# Altium PCB TFT.PcbDoc
Units mil, origin at the board's own origin, x right, y up, seen from the top; angles counter-clockwise.
Board outline 1574.8 x 1574.8 mil, 2 copper layers (Top Layer, Bottom Layer), stack 50.044 mil thick; 7 components, 10 nets, 38 pads, 0 vias.
Unrouted connection lines stored in the file: 8.
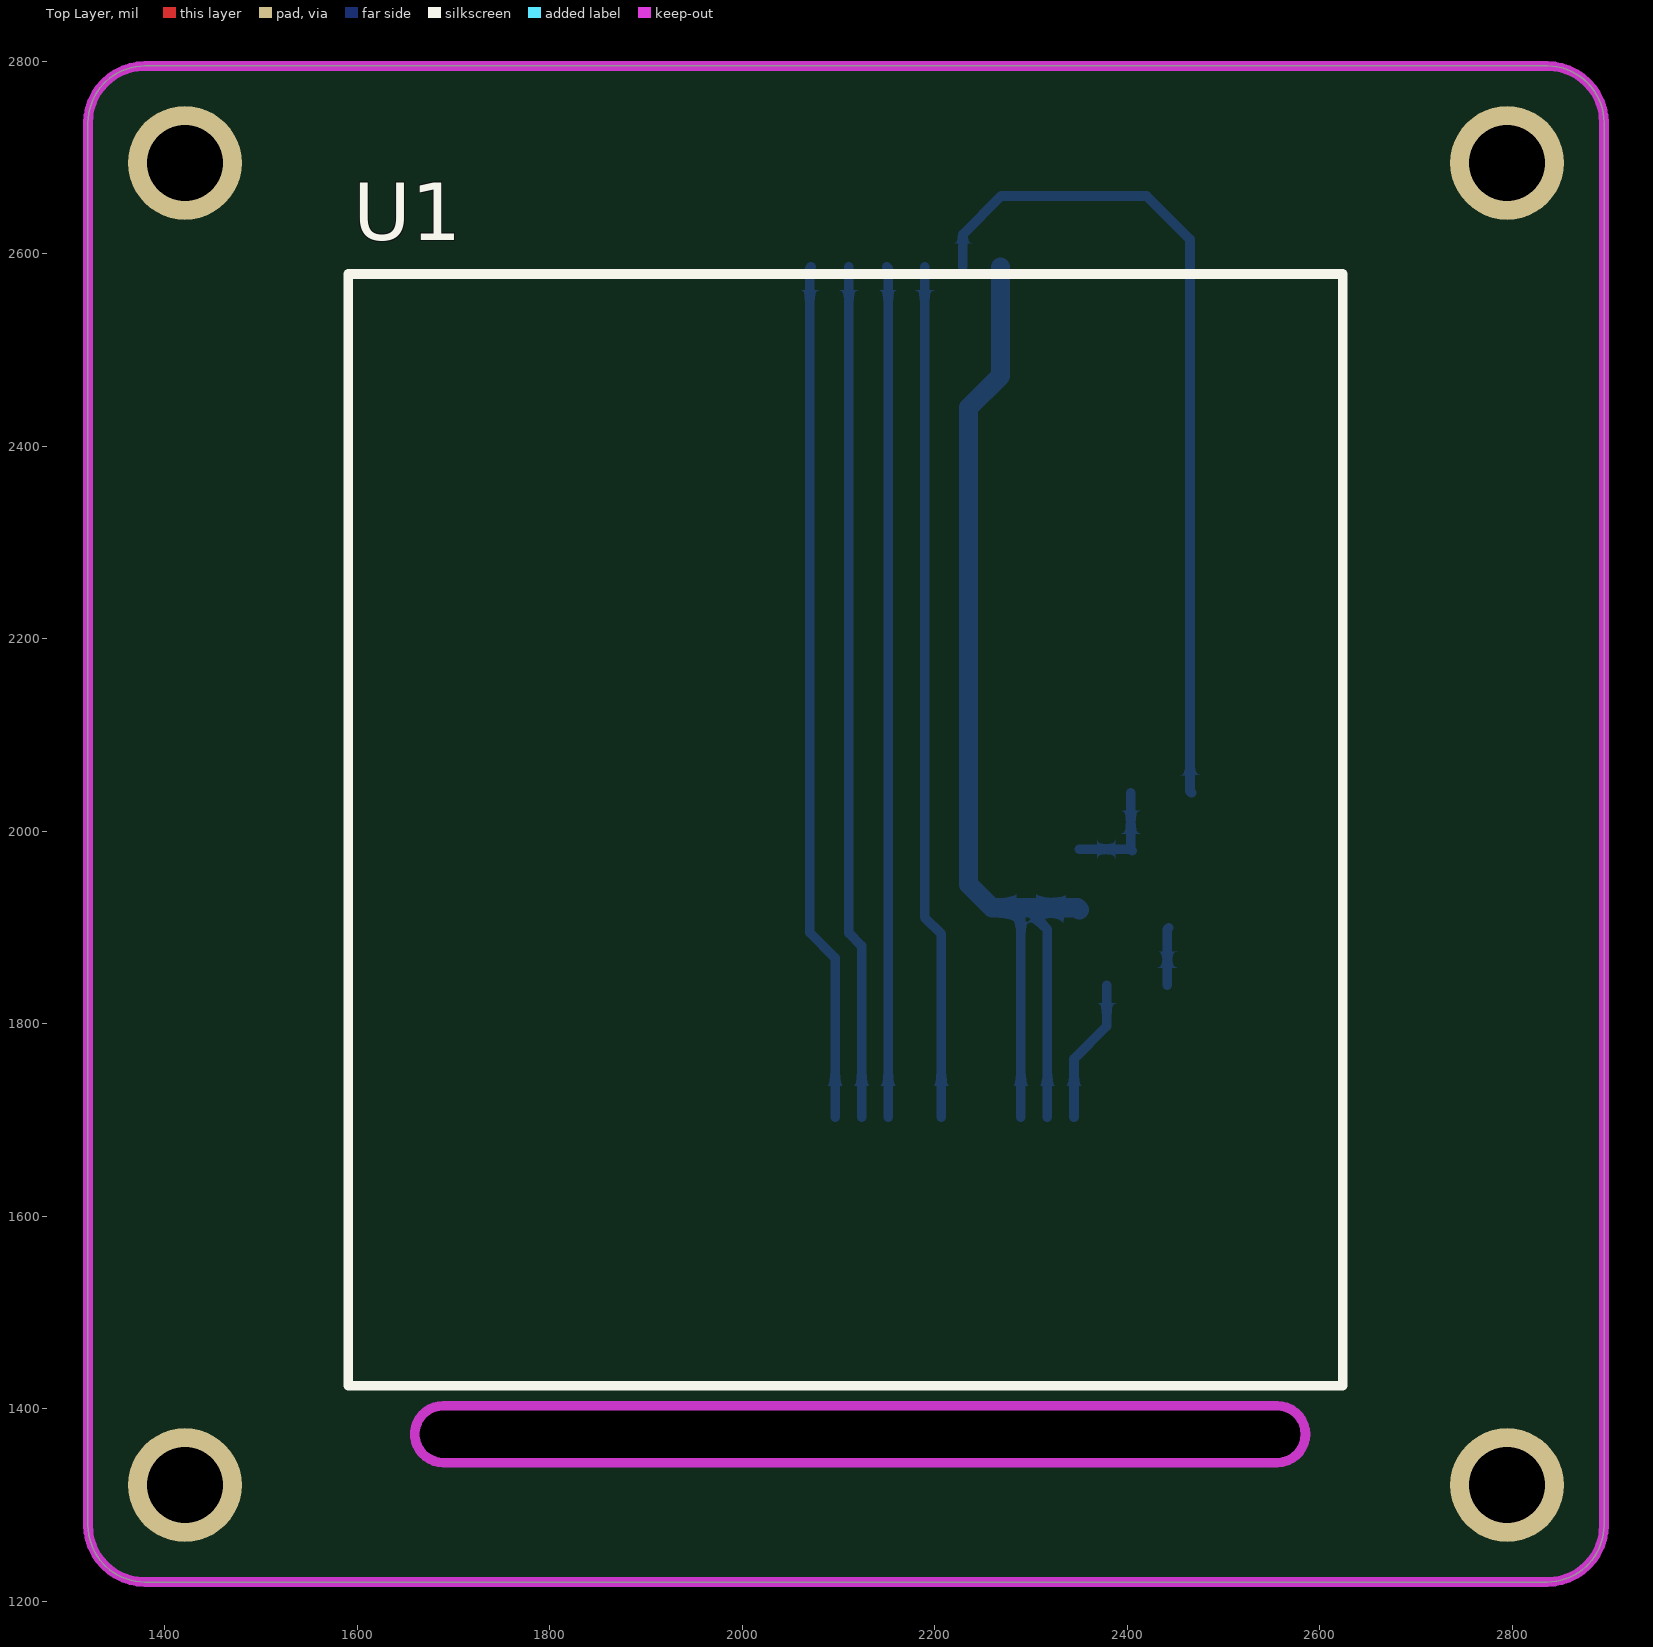
[diagram p0: Top Layer view]
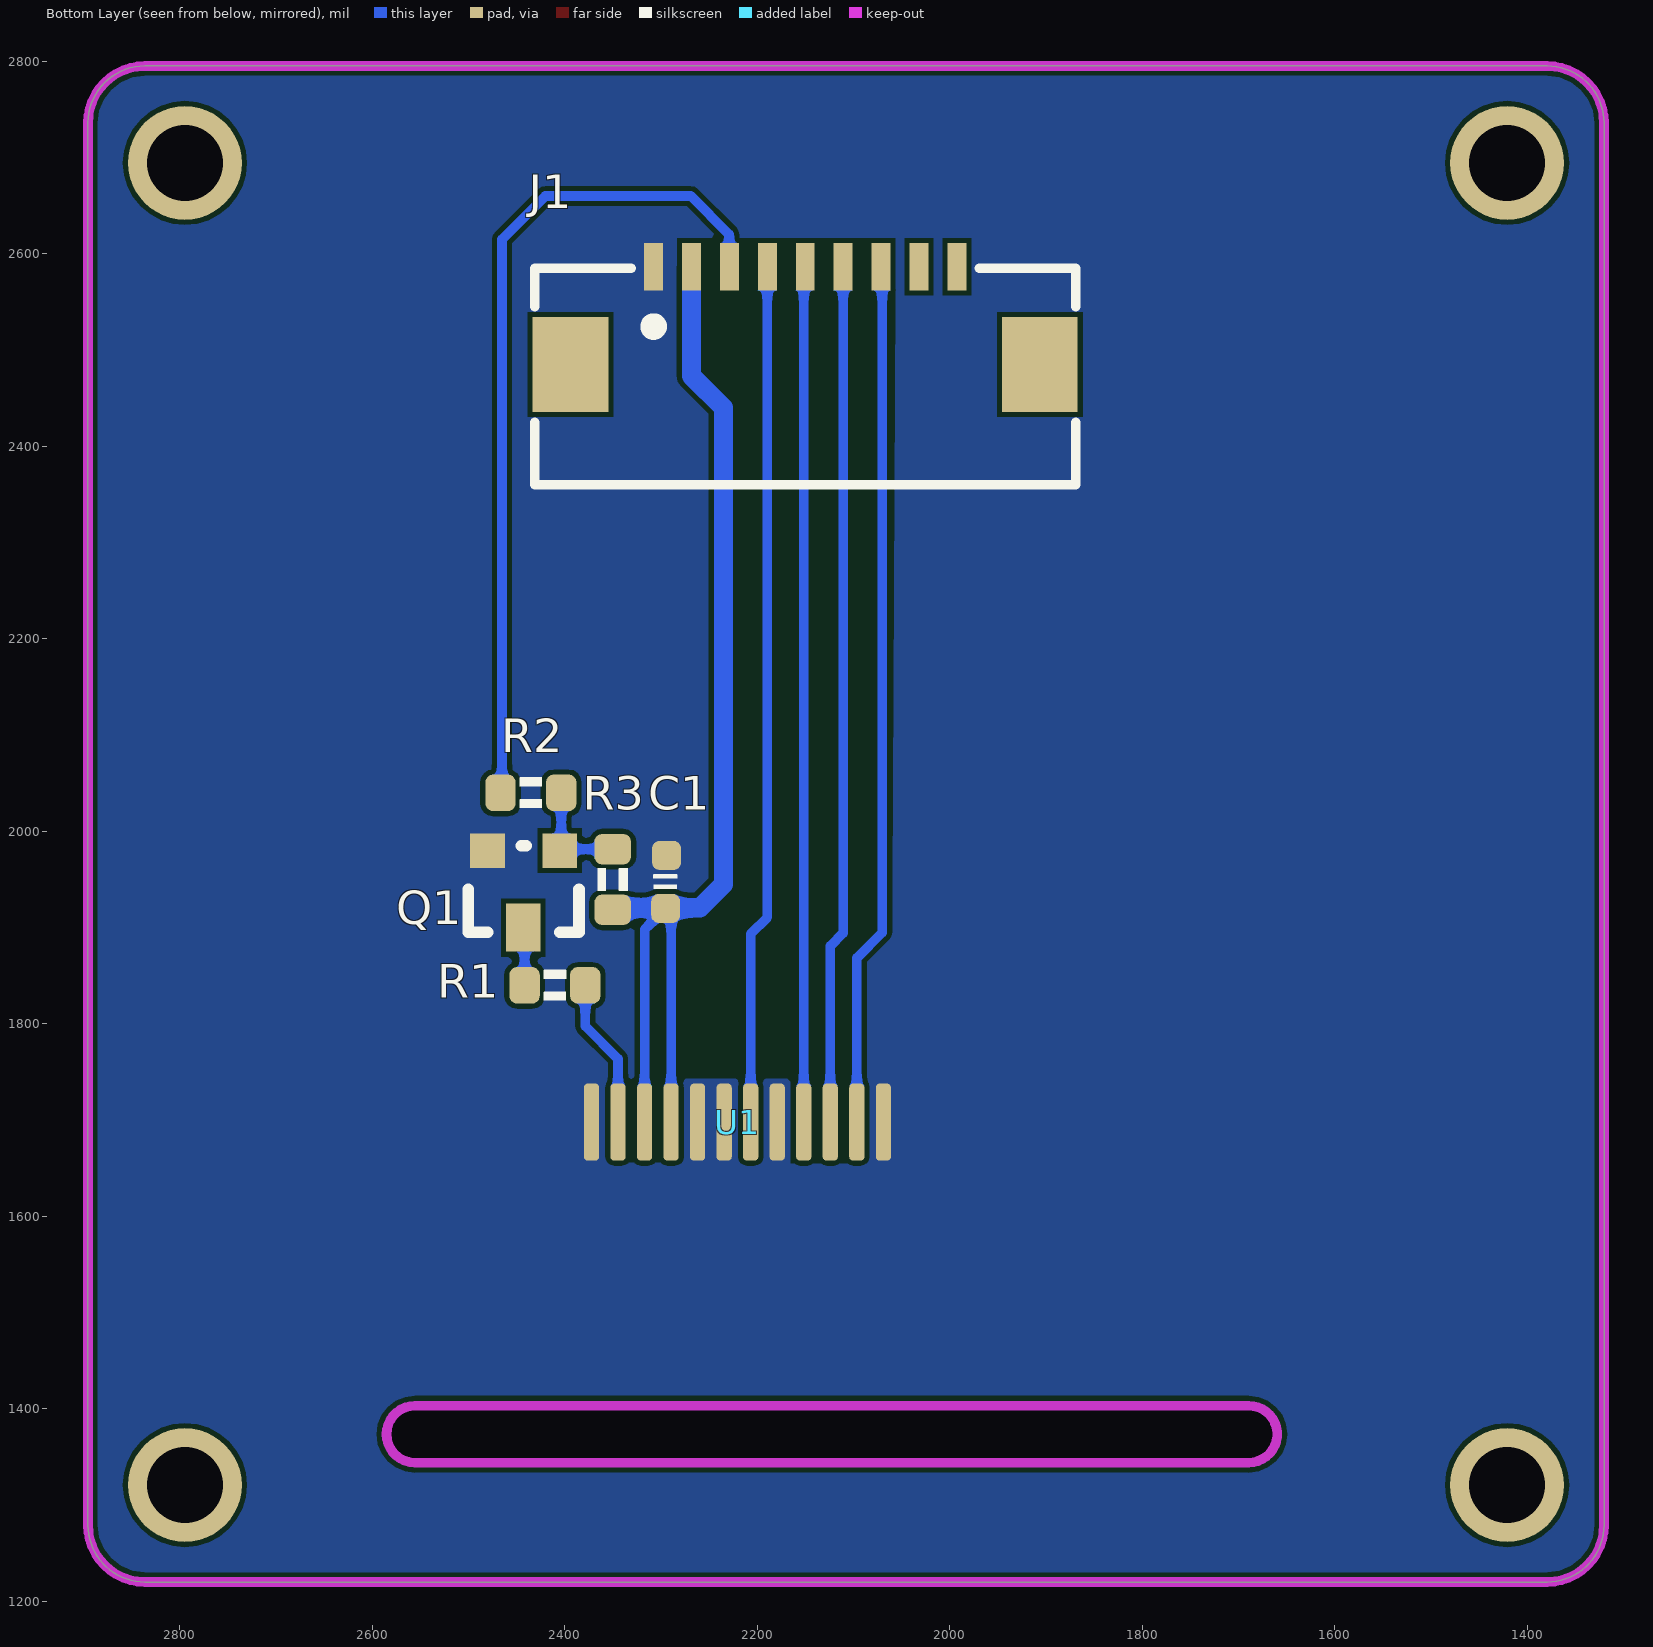
[diagram p1: Bottom Layer view, seen from below]
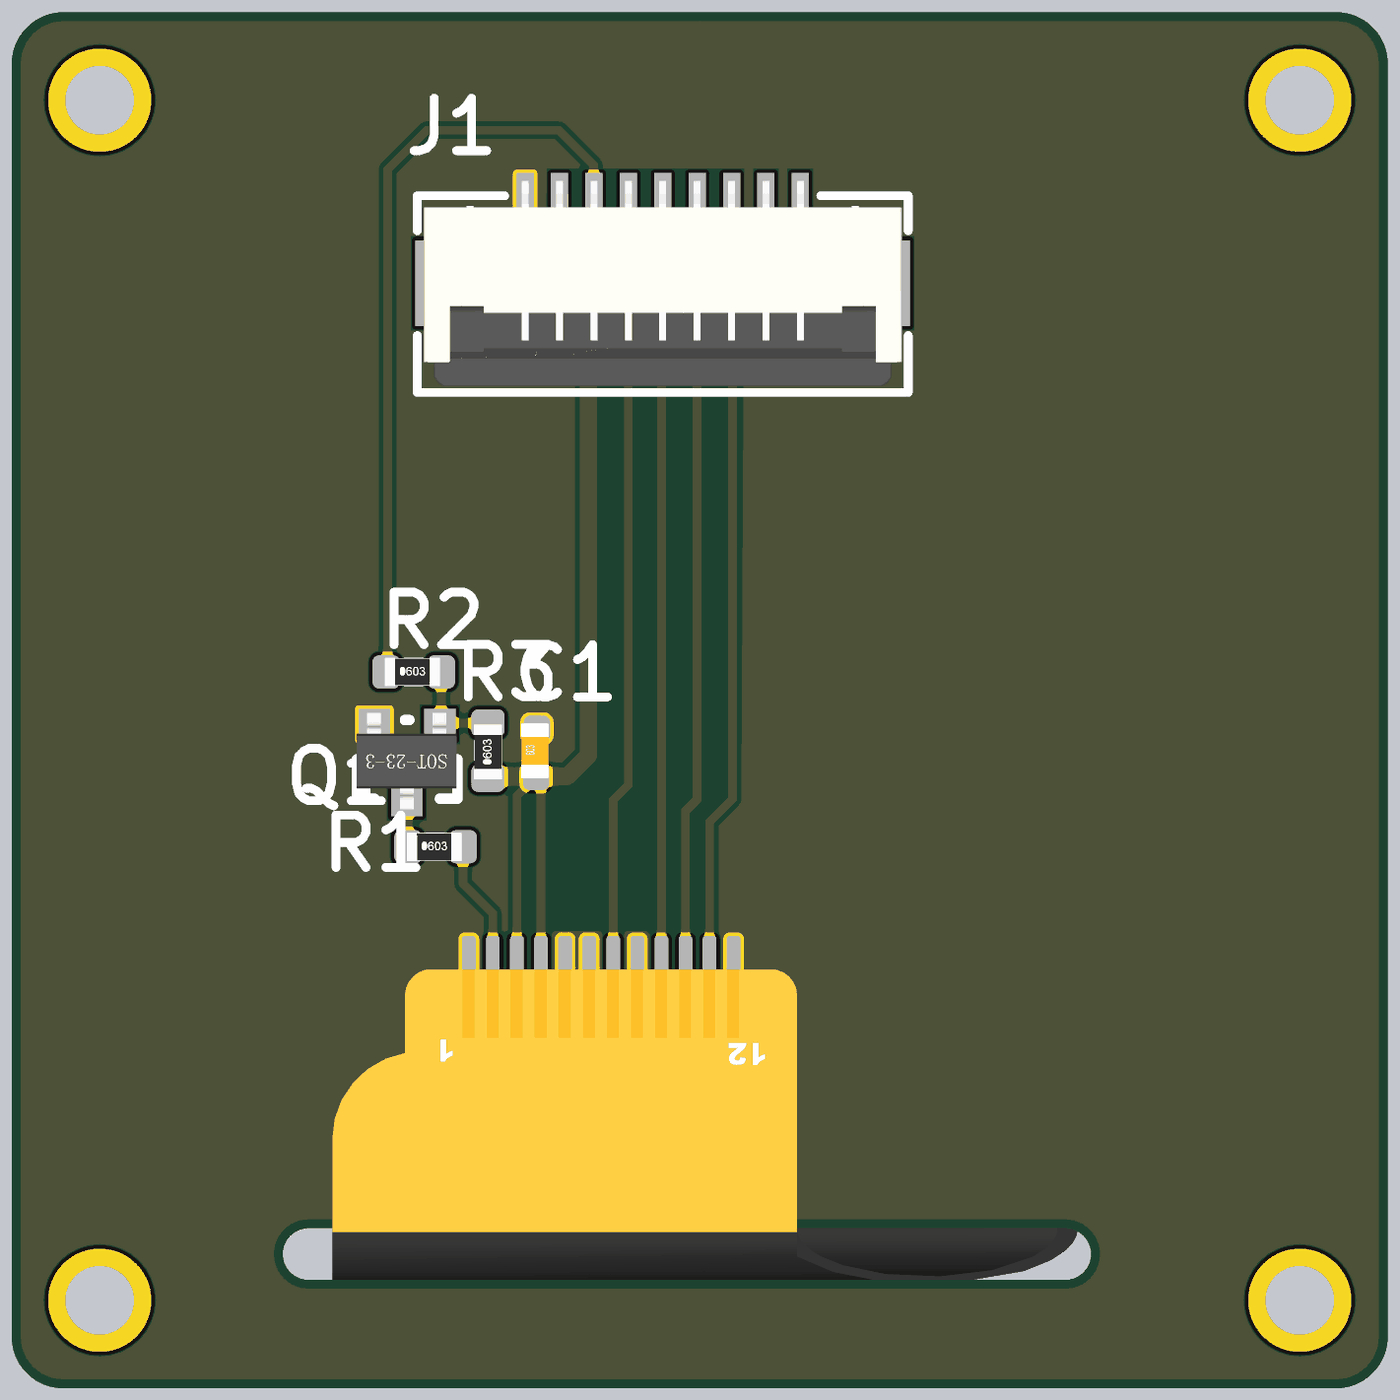
[diagram p2: 3D render of the assembled board from below, using the file's embedded part models]

## Layer stack, top to bottom
Top Solder: solder mask 0.4, Solder Resist, Dk 3.5
Top Layer: signal copper 1.4
Dielectric 1: dielectric 47.244, FR-4, Dk 4.8
Bottom Layer: signal copper 1.4
Bottom Solder: solder mask 0.4, Solder Resist, Dk 3.5

## Board outline
1320.25,1279.31 1320.25,2736 cw(c1379.31,2736) 1379.31,2795.05 2836,2795.05 cw(c2836,2736) 2895.05,2736 2895.05,1279.31 cw(c2836,1279.31) 2836,1220.25 1379.31,1220.25 cw(c1379.31,1279.31)
cut-out: 1689.27,1344.3 cw(c1689.27,1373.83) 1689.27,1403.36 2555.41,1403.36 cw(c2555.41,1373.83) 2555.41,1344.3

## Design rules (kind name [scope] priority, off if disabled: settings)
Clearance [All] p1: gap=5 ignorepadtopadclearanceinfootprint=FALSE except(0: Arc-Hole Track-Hole SMDPad-Hole THPad-Hole Via-Hole Fill-Hole Poly-Hole Region-Hole Text-Hole)
HoleSize [All] p1: absolutevalues=TRUE maxlimit=99999 minlimit=1 maxpercent=80.000 minpercent=20.000
PlaneClearance [All] p1: clearance=8
PlaneConnect [All] p1: planeconnectstyle=Direct reliefexpansion=20 reliefentries=4 reliefconductorwidth=10 reliefairgap=10
PolygonConnect [All] p1: connectstyle=Direct reliefconductorwidth=10 reliefentries=4 polygonreliefangle="90 Angle" airgapwidth=10
RoutingVias [All] p1: holewidth=15 width=20 viastyle="Through Hole" minholewidth=8 minwidth=10 maxholewidth=28 maxwidth=50
SolderMaskExpansion [All] p1: expansion=4 istentingtop=FALSE
Width [All] p1: maxlimit=99999 minlimit=5 preferedwidth=20
27 further rules are at their usual default settings.

## Components (designator, comment, footprint, x,y, rotation, side; value= is the part's Value field where it differs from the comment)
C1 "100nf" 0603C 2294.5,1947.5 r90 bottom
J1 "FPC1.0-9P" FPC1.0-9P 2150,2485 r180 bottom
Q1 "S8050" SOT-23 2440,1945 r0 bottom
R1 "10R" 0603R 2410,1840 r180 bottom
R2 "1K" 0603R 2435,2040 r180 bottom
R3 "10K" 0603R 2350,1950 r90 bottom
U1 "133HO1D" LCD-240X240-NOHOLE 2090,1905 r0 top

## Footprints (in the part's own frame and the unit in brackets; to place one, negate y for a bottom-side part, rotate by r counter-clockwise, add the part's x,y. Pads: shape width x height; smd on the part's side, far side on the other; paste and mask are expansions set on the pad)
0603C [mil]
  rrect50% 30x30 smd: 1(-27.5,0.5) 2(27.5,-0.5)
  silkscreen extent -7,-11 7,13, body extent -29,-14 34,17, height 12
0603R [mm]
  rrect50% 0.8x0.965 smd: 1(-0.8,0) 2(0.8,0)
  silkscreen extent -0.29,-0.4 0.29,0.4, body extent -0.84,-0.41 0.76,0.41, height 0.45
FPC1.0-9P [mm]
  rect 2x2.5 smd: 0(-6.19,0) 0(6.19,0)
  rect 0.5x1.25 smd: 1(-4,2.575) 2(-3,2.575) 3(-2,2.575) 4(-1,2.575) 5(0,2.575) 6(1,2.575) 7(2,2.575) 8(3,2.575) 9(4,2.575)
  silkscreen extent -7.14,-3.18 7.14,2.54, body extent -6.95,-3 6.95,3, height 2
LCD-240X240-NOHOLE [mil]
  rrect50% 15.75x80 smd far side: 1(282,-207) 2(254.44,-207) 3(226.88,-207) 4(199.32,-207) 5(171.76,-207) 6(144.2,-207) 7(116.65,-207) 8(89.09,-207) 9(61.53,-207) 10(33.97,-207) 11(6.41,-207) 12(-21.15,-207)
  silkscreen extent -499,-481 534,674, body extent -499,-565 534,673, height 20
SOT-23 [mil]
  rect 36x36 smd: B(-35,-35) E(40,-35)
  rect 36x50 smd: C(3,45)
  silkscreen extent -55,-40 60,50, body extent -54,-48 60,62, height 47

## Part data
C1: library part CAP, "无极性电容"
J1: "贴片"
Q1: library part NPN, "NPN三极管"
R1 R2 R3: library part RES
U1: "1.3 TFT IPS"

## Free pads (board coordinates)
  round 118.11 hole 78.74: 2(1420.94,1320.94) 2(1420.94,2694.36) 2(2794.36,1320.94) 2(2794.36,2694.36)

## Nets (pads, with @x,y where several pads share a name; then routed paths per layer and width w, separated by ;. In a path a pad name is that pad's centre, name@x,y a point inside that pad or via, vN(x,y) a via of type N, cw(c..) or ccw(c..) an arc to the next point about the centre after c; other vN are vias at no path point)
DC: J1.4 U1.7 | length 890.5
  Bottom Layer w10: J1.4 2189.37,1910.63 2206.65,1893.35 U1.7@2206.65,1703
GND: C1.2 J1.1 Q1.E U1.1 U1.5 U1.6 U1.8 U1.12
LEDK: R1.2 U1.2 | length 151.1
  Bottom Layer w10: U1.2@2344.44,1703 2344.44,1763.64 2378.5,1797.71 R1.2
NetQ1_B: Q1.B R2.2 R3.2 | length 114.1
  Bottom Layer w10: R3.2 Q1.B@2403.5,1981.5 ; R2.2 Q1.B@2403.5,1981.5 ; Q1.B Q1.B@2403.5,1981.5
NetQ1_C: Q1.C R1.1 | length 60.6
  Bottom Layer w10: R1.1 2441.5,1898.5 Q1.C
RES: J1.7 U1.11 | length 894.8
  Bottom Layer w10: J1.7 2070,2585.12 2070,1895 2096.41,1868.59 U1.11@2096.41,1703
SCL: J1.5 U1.9 | length 884
  Bottom Layer w10: J1.5 2151.53,2584.85 U1.9@2151.53,1703
SDA: J1.6 U1.10 | length 888.9
  Bottom Layer w10: J1.6 2110.63,1894.37 2123.97,1881.03 U1.10@2123.97,1703
TFT_BL: J1.3 R2.1 | length 880.6
  Bottom Layer w10: J1.3 2229.02,2586.65 2229.02,2620.13 2268.89,2660 2420,2660 2465,2615 2465,2041.5 R2.1
VCC: C1.1 J1.2 R3.1 U1.3 U1.4 | length 1226.5
  Bottom Layer w10: U1.4@2289.32,1703 2289.32,1914.32 C1.1 2316.88,1898.12 U1.3@2316.88,1703
  Bottom Layer w20: J1.2 2268.11,2473.11 2235,2440 2235,1945 2259.41,1920.59 2347.92,1920.59 R3.1
pads on no net: J1.0 J1.8 J1.9

## Polygon pours and split planes (outlines as drawn)
GND on Bottom Layer "GND_L02_P004" (solid, remove dead copper, pour order 4): 1320.25,1279.31 ccw(c1379.31,1279.31) 1379.31,1220.25 2836,1220.25 ccw(c2836,1279.31) 2895.05,1279.31 2895.05,2736 ccw(c2836,2736) 2836,2795.05 1379.31,2795.05 ccw(c1379.31,2736) 1320.25,2736

## Keep-outs
Keep-Out Layer:
  lines w10: 1320.25,1279.31 ccw(c1379.31,1279.31) 1379.31,1220.25 2836,1220.25 ccw(c2836,1279.31) 2895.05,1279.31 2895.05,2736 ccw(c2836,2736) 2836,2795.05 1379.31,2795.05 ccw(c1379.31,2736) 1320.25,2736 1320.25,1279.31 ; 1689.27,1344.3 cw(c1689.27,1373.83) 1689.27,1403.36 2555.41,1403.36 cw(c2555.41,1373.83) 2555.41,1344.3 1689.27,1344.3

## Other copper
Bottom Layer:
  pour cut-out: 2056.42,2615.98 2243.58,2615.98 2262.84,2615.98 2262.84,2465 2235,2430 2235,1945 2262.84,1917.16 2292.16,1917.16 2292.16,1752.16 2283.33,1743.33 2164.9,1743.33 2165.1,1655 2086.21,1655 2086.21,1878.79 2060,1905